# Altium PCB pcb.PcbDoc
Units mm, origin at the board's own origin, x right, y up, seen from the top; angles counter-clockwise.
Board outline 100 x 67 mm, 2 copper layers (Top Layer, Bottom Layer), stack 1.571 mm thick; 72 components, 66 nets, 297 pads, 14 vias.
Unrouted connection lines stored in the file: 43.
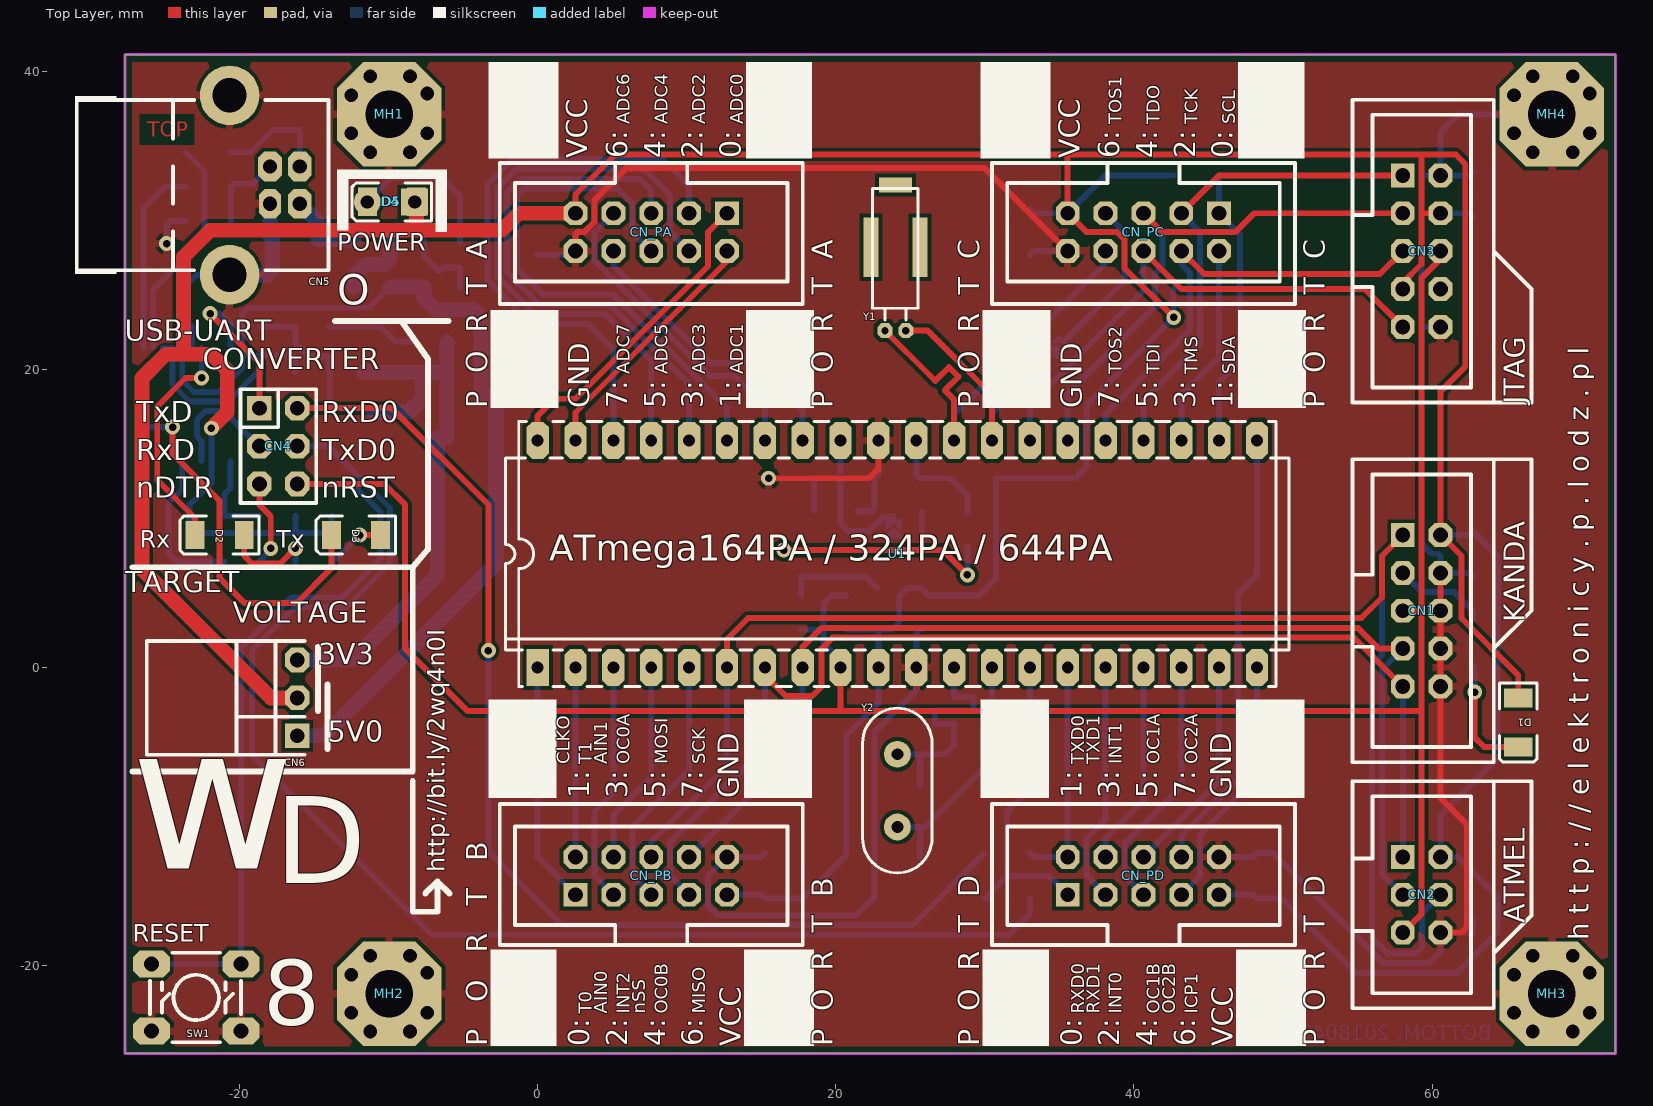
[diagram p0: Top Layer view]
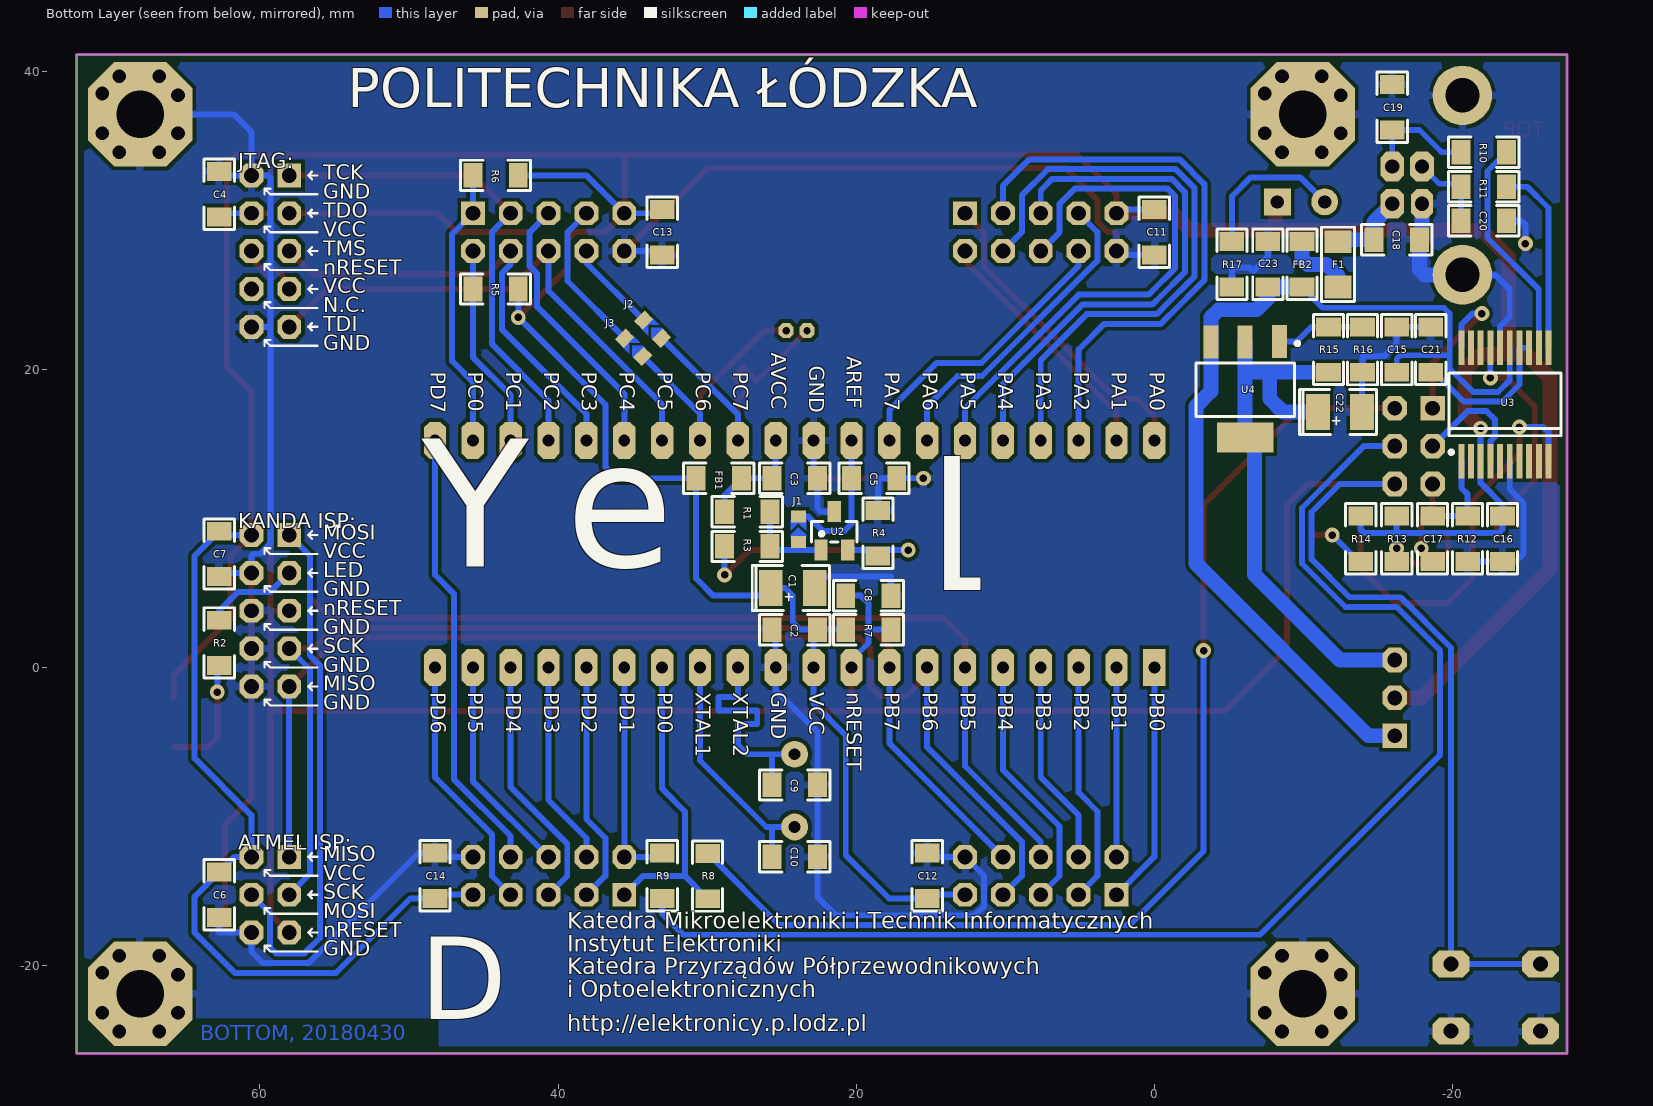
[diagram p1: Bottom Layer view, seen from below]
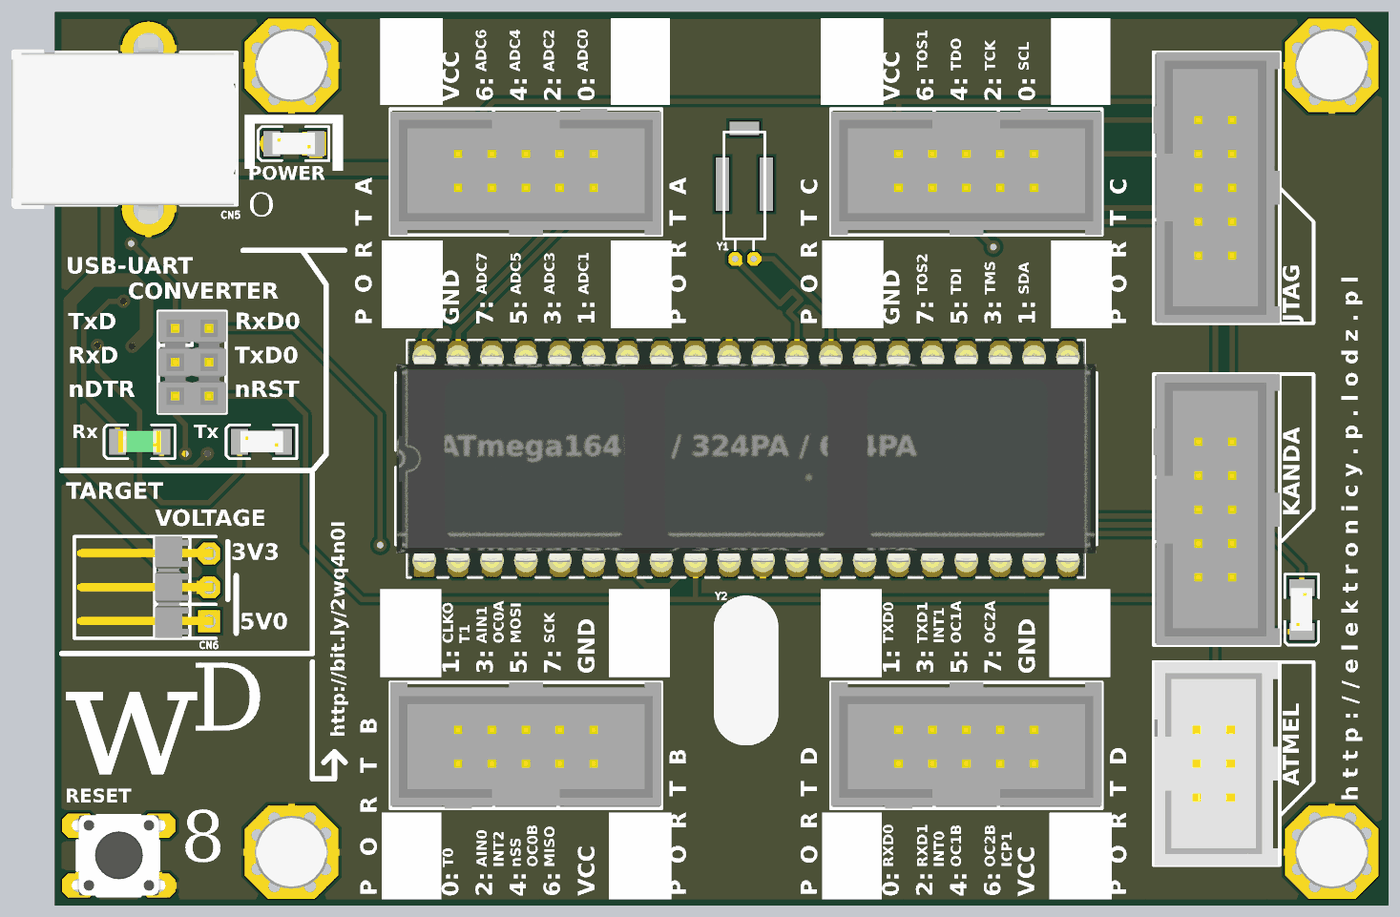
[diagram p2: 3D render of the assembled board from above, using the file's embedded part models]
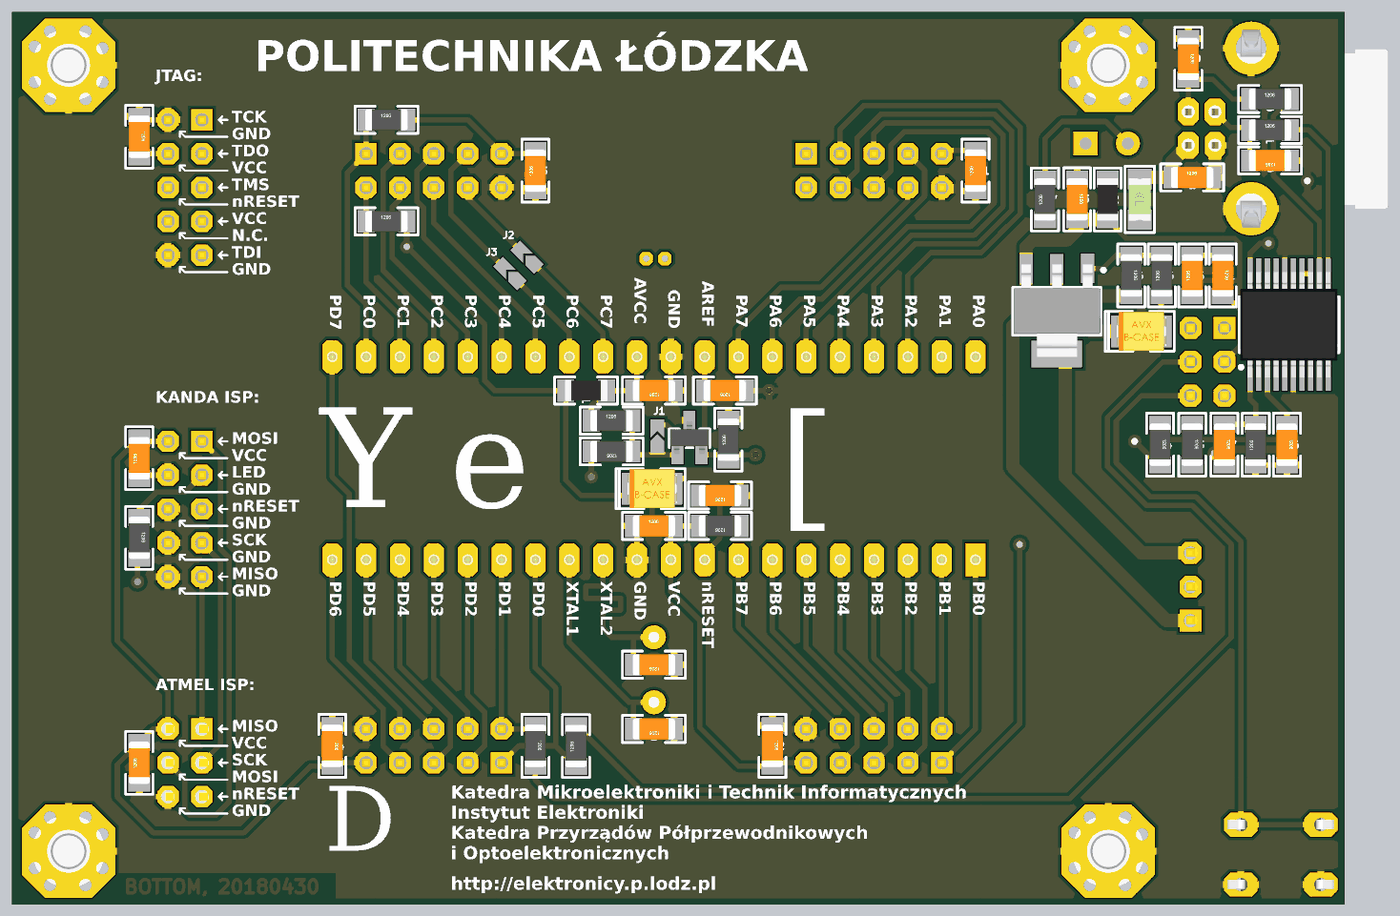
[diagram p3: 3D render of the assembled board from below, using the file's embedded part models]

## Layer stack, top to bottom
Top Solder: solder mask 0.0102, Solder Resist, Dk 3.5
Top Layer: signal copper 0.0356
Dielectric 1: dielectric 1.5, FR-4, Dk 4.8
Bottom Layer: signal copper 0.0356
Bottom Solder: solder mask 0.0102, Solder Resist, Dk 3.5

## Board outline
-27.7,-25.88 -27.7,41.12 72.3,41.12 72.3,-25.88

## Design rules (kind name [scope] priority, off if disabled: settings)
Clearance [All] p1: gap=0.254 ignorepadtopadclearanceinfootprint=FALSE except(0: Arc-Hole Track-Hole SMDPad-Hole THPad-Hole Via-Hole Fill-Hole Poly-Hole Region-Hole Text-Hole)
PolygonConnect [All] p1: connectstyle=Relief reliefconductorwidth=0.5 reliefentries=4 polygonreliefangle="90 Angle" airgapwidth=0.254
RoomDefinition "USB & POWER SHEET" [InComponentClass('USB & POWER SHEET')] p1: confinementstyle=ConfineIn formatcopy=TRUE lockcomponents=FALSE outline -76.2,-71.12 -25.4,-71.12 -25.4,-45.72 -76.2,-45.72
RoomDefinition mcu_with_peripherals [InComponentClass('mcu_with_peripherals')] p2: confinementstyle=ConfineIn formatcopy=TRUE lockcomponents=FALSE outline -46.863,-26.035 151.892,-26.035 151.892,41.275 -46.863,41.275
RoutingVias [All] p1: holewidth=0.5 width=1 viastyle="Through Hole" minholewidth=0.5 minwidth=1 maxholewidth=0.5 maxwidth=1
SolderMaskExpansion [All] p1: expansion=0.102
Width [All] p1: maxlimit=1 minlimit=0.254 preferedwidth=0.4 minimp=50.000000 maximp=50.000000 favimp=50.000000
30 further rules are at their usual default settings.

## Classes and differential pairs
component class "USB & POWER SHEET": C15 C16 C17 C18 C19 C20 C21 C22 C23 CN4 CN5 CN6 D2 D3 D4 D5 D? F1 FB2 R8 R9 R10 R11 R12 R13 R14 R15 R16 R17 R100 R101 R? U3 U4
component class mcu_with_peripherals: C1 C2 C3 C4 C5 C6 C7 C8 C9 C10 C11 C12 C13 C14 CN1 CN2 CN3 CN_PA CN_PB CN_PC CN_PD D1 FB1 J1 J2 J3 MH1 MH2 MH3 MH4 R1 R2 R3 R4 R5 R6 R7 SW1 U1 U2 Y1 Y2

## Components (designator, comment, footprint, x,y, rotation, side; value= is the part's Value field where it differs from the comment)
C1 "4,7uF/10V" SMDB 24.257,5.334 r0 bottom
C2 "100nF" C1206 24.13,2.54 r180 bottom
C3 "100nF" C1206 24.126,12.7 r0 bottom
C4 "100nF" C1206 62.738,31.75 r270 bottom locked
C5 "100nF" C1206 18.805,12.7 r0 bottom
C6 "100nF" C1206 62.738,-15.24 r90 bottom locked
C7 "100nF" C1206 62.738,7.62 r90 bottom locked
C8 "100nF" C1206 19.177,4.826 r0 bottom
C9 "22pF" C1206 24.13,-7.874 r0 bottom
C10 "22pF" C1206 24.13,-12.7 r0 bottom
C11 "100nF" C1206 0,29.21 r90 bottom
C12 "100nF" C1206 15.24,-13.97 r270 bottom
C13 "100nF" C1206 33.02,29.21 r90 bottom
C14 "100nF" C1206 48.26,-13.97 r270 bottom
C15 "100nF" C1206 -16.256,21.336 r90 bottom
C16 "100nF" C1206 -23.361,8.636 r270 bottom
C17 "100nF" C1206 -18.669,8.636 r270 bottom
C18 "10nF" C1206 -16.256,28.702 r180 bottom
C19 "47pF" C1206 -15.96,37.592 r270 bottom
C20 "47pF" C1206 -22.098,29.972 r0 bottom
C21 "100nF" C1206 -18.542,21.336 r270 bottom
C22 "10uF/10V" SMDB -12.446,17.145 r0 bottom
C23 "100nF" C1206 -7.62,27.051 r270 bottom
CN1 "AVR ISP Kanda Interface" IDC10 59.309,3.81 r270 top locked
CN2 "AVR ISP Interface" IDC6 59.309,-15.24 r270 top locked
CN3 "AVR JTAG Interface" IDC10 59.309,27.94 r270 top locked
CN4 "" GP_3x2 -18.669,17.399 r270 top
CN5 "USB B SOCKET" USBB-G -16.96,32.37 r0 top
CN6 "CN_3x1" GP_3x1H -16.129,-4.572 r90 top
CN_PA "IDC Connector" IDC10 7.62,29.21 r180 top
CN_PB "IDC Connector" IDC10 7.62,-13.97 r0 top
CN_PC "IDC Connector" IDC10 40.64,29.21 r180 top
CN_PD "IDC Connector" IDC10 40.64,-13.97 r0 top
D1 "*" LED1206R 65.786,-3.683 r270 top
D2 "" LED1206G -21.336,8.89 r180 top
D3 "" LED1206R -12.192,8.89 r180 top
D4 "LED" "LED-Polarized - 3mm" -8.255,31.242 r180 top
D5 "" LED1206R -9.779,31.242 r180 top
F1 "500mA, 6V" F1206 -12.319,27.051 r270 bottom
FB1 "BLM31PG601SN1L" FB1206 29.214,12.7 r180 bottom
FB2 "BLM31PG601SN1L" FB1206 -9.906,27.051 r90 bottom
J1 "*" JMP2_0603_NO 23.876,9.271 r90 bottom
J2 "*" JMP2_0603_NO 33.655,22.701 r45 bottom
J3 "*" JMP2_0603_NO 34.925,21.485 r45 bottom
MH1 "MHOLE 3mm" "3mm screw drill III" -9.96,37.12 r0 top locked
MH2 "MHOLE 3mm" "3mm screw drill III" -9.96,-21.88 r0 top locked
MH3 "MHOLE 3mm" "3mm screw drill III" 68.04,-21.88 r0 top locked
MH4 "MHOLE 3mm" "3mm screw drill III" 68.04,37.12 r0 top locked
R1 "4k7" R1206 27.305,10.446 r180 bottom
R2 "510R" R1206 62.738,1.651 r270 bottom value=4k7
R3 "4k7" R1206 27.305,8.128 r0 bottom
R4 "4k7" R1206 18.542,9.017 r90 bottom
R5 "4k7" R1206 44.196,25.4 r180 bottom
R6 "4k7" R1206 44.196,33.02 r180 bottom
R7 "10k" R1206 19.177,2.54 r0 bottom
R8 "1k" R1206 29.972,-13.986 r90 bottom
R9 "1k" R1206 33.02,-13.97 r270 bottom
R10 "27R" R1206 -22.098,34.58 r180 bottom
R11 "27R" R1206 -22.098,32.258 r180 bottom
R12 "1k" R1206 -21.017,8.636 r90 bottom
R13 "1k" R1206 -16.256,8.636 r270 bottom
R14 "1k" R1206 -13.843,8.636 r270 bottom
R15 "N.M." R1206 -11.684,21.336 r270 bottom
R16 "0R" R1206 -13.97,21.336 r90 bottom
R17 "1k" R1206 -5.207,27.051 r90 bottom
SW1 "TACT-64K-F" TACT-64K-F -22.908,-22.134 r180 top
U1 "ATmega324PA-PU" DIP40_PRECISION_W_IC 24.13,7.62 r90 top
U2 "TL431" SOT-23 21.463,9.176 r180 bottom
U3 "FT231XS" SSOP20 -20.596,13.843 r180 bottom
U4 "APE1117K-HF-3" SOT-223 -8.396,21.844 r0 bottom
Y1 "32,7456kHz" TC38_3x8_H 24.003,22.606 r0 top
Y2 "*" HC49-S 24.13,-8.255 r270 top

## Footprints (in the part's own frame and the unit in brackets; to place one, negate y for a bottom-side part, rotate by r counter-clockwise, add the part's x,y. Pads: shape width x height; smd on the part's side, far side on the other; paste and mask are expansions set on the pad)
"3mm screw drill III" [mil]
  oct 275.59x275.59 hole 125.98: 1(0,0)
  round 62 hole 36: 2(-50,-100) 3(55,-100) 4(-100,50) 5(-100,-50) 6(100,-50) 7(100,55) 8(-50,100) 9(55,100)
  body extent -108,-108 108,108, height 79
C1206 [mil]
  rect 50x65 smd: 1(-60,0) 2(60,0)
  silkscreen extent -93,-40 93,40, body extent -63,-31 63,31, height 39
DIP40_PRECISION_W_IC [mm]
  rect 2.5x1.5 hole 0.8: 1(-7.62,24.13)
  oct 2.5x1.5 hole 0.8: 2(-7.62,21.59) 3(-7.62,19.05) 4(-7.62,16.51) 5(-7.62,13.97) 6(-7.62,11.43) 7(-7.62,8.89) 8(-7.62,6.35) 9(-7.62,3.81) 10(-7.62,1.27) 11(-7.62,-1.27) 12(-7.62,-3.81) 13(-7.62,-6.35) 14(-7.62,-8.89) 15(-7.62,-11.43) 16(-7.62,-13.97) 17(-7.62,-16.51) 18(-7.62,-19.05) 19(-7.62,-21.59) 20(-7.62,-24.13) 21(7.62,-24.13) 22(7.62,-21.59) 23(7.62,-19.05) 24(7.62,-16.51) 25(7.62,-13.97) 26(7.62,-11.43) 27(7.62,-8.89) 28(7.62,-6.35) 29(7.62,-3.81) 30(7.62,-1.27) 31(7.62,1.27) 32(7.62,3.81) 33(7.62,6.35) 34(7.62,8.89) 35(7.62,11.43) 36(7.62,13.97) 37(7.62,16.51) 38(7.62,19.05) 39(7.62,21.59) 40(7.62,24.13)
  silkscreen extent -8.89,-26.29 8.89,26.29, body extent -8.85,-26.23 8.85,26.22, height 10
F1206 [mil] "1206 Fuse: PTC polymer"
  rect 60x70.87 smd: 1(-60,0) 2(60,0)
  silkscreen extent -98,-43 98,43, body extent -63,-33 63,33, height 22
FB1206 [mil]
  rect 50x65 smd: 1(-60,0) 2(60,0)
  silkscreen extent -93,-40 93,40, body extent -63,-31 63,31, height 43
GP_3x1H [mil]
  rect 65x65 hole 39.37: 1(0,0)
  oct 65x65 hole 39.37: 2(100,0) 3(200,0)
  silkscreen extent -50,-20 250,398, body extent -49,-13 251,390, height 121
GP_3x2 [mil]
  rect 65x65 hole 39.37: 1(0,0)
  oct 65x65 hole 39.37: 2(0,100) 3(100,0) 4(100,100) 5(200,0) 6(200,100)
  silkscreen extent -50,-50 250,150, body extent -50,-50 250,150, height 330
HC49-S [mm] "Crystal Oscillator"
  round 1.8 hole 0.8: 1(-2.44,0) 2(2.44,0)
  silkscreen extent -5.53,-2.32 5.53,2.32, body extent -5.62,-2.35 5.55,2.33, height 3.63
IDC6 [mm] "2.54mm, 6 Pin IDC Male Connector"
  rect 1.6x1.6 hole 1: 1(-2.54,-1.27)
  oct 1.6x1.6 hole 1: 2(-2.54,1.27) 3(0,-1.27) 4(0,1.27) 5(2.54,-1.27) 6(2.54,1.27)
  silkscreen extent -7.62,-4.64 7.61,4.83, body extent -7.62,-4.57 7.62,4.7, height 9.29
IDC10 [mm] "2.54mm, 10 Pin IDC Male Connector"
  rect 1.6x1.6 hole 1: 1(-5.08,-1.27)
  oct 1.6x1.6 hole 1: 2(-5.08,1.27) 3(-2.54,-1.27) 4(-2.54,1.27) 5(0,-1.27) 6(0,1.27) 7(2.54,-1.27) 8(2.54,1.27) 9(5.08,-1.27) 10(5.08,1.27)
  silkscreen extent -10.16,-4.64 10.16,4.83, body extent -10.16,-4.65 10.16,4.83, height 9.27
JMP2_0603_NO [mil]
  rect 32x40 smd: 1(-33.75,0) 2(33.75,0)
  Top Layer region: 26.25,0 16.25,0 -3.75,-20 26.25,-20
  Top Layer region: 26.25,0 16.25,0 -3.75,20 26.25,20
  Top Layer region: -23.75,-20 -13.75,-20 6.25,0 -13.75,20 -23.75,20
LED1206G [mm]
  rect 1.27x1.9 smd: 1(-1.65,0) 2(1.65,0)
  silkscreen extent -2.64,-1.27 2.67,1.27, body extent -1.6,-0.81 1.6,0.79, height 1.11
LED1206R [mm]
  rect 1.27x1.9 smd: 1(-1.65,0) 2(1.65,0)
  silkscreen extent -2.64,-1.27 2.67,1.27, body extent -1.6,-0.81 1.6,0.79, height 1.11
"LED-Polarized - 3mm" [mm]
  rect 1.8x1.8 hole 0.889: 1(0,0)
  round 1.8 hole 0.889: 2(3.175,0)
R1206 [mil]
  rect 50x65 smd: 1(-60,0) 2(60,0)
  silkscreen extent -93,-40 93,40, body extent -63,-31 63,31, height 39
SMDB [mm] "SMDB"
  rect 1.6x2.4 smd: 1(1.476,0) 2(-1.475,0)
  silkscreen extent -2.46,-1.5 2.72,1.5, body extent -1.85,-1.46 1.85,1.47, height 2.03
SOT-23 [mm]
  rect 0.9x1.4 smd: 1(-0.9,-1.3) 2(0.9,-1.3) 3(0,1.3)
  silkscreen extent -1.52,-0.76 1.52,0.64, body extent -1.46,-1.25 1.46,1.23, height 1
SOT-223 [mm]
  rect 1x2.2 smd: 1(0,-0.027) 2(2.3,0) 3(4.6,0)
  rect 3.8x2 smd: 4(2.3,6.4)
  silkscreen extent -1.32,-0.02 5.6,5, body extent -0.96,-0.32 5.54,6.61, height 1.64
SSOP20 [mm]
  rect 0.4x2.3 smd: 1(0,0) 2(0.65,0) 3(1.3,0) 4(1.95,0) 5(2.6,0) 6(3.25,0) 7(3.9,0) 8(4.55,0) 9(5.2,0) 10(5.85,0) 11(5.85,7.62) 12(5.2,7.62) 13(4.55,7.62) 14(3.9,7.62) 15(3.25,7.62) 16(2.6,7.62) 17(1.95,7.62) 18(1.3,7.62) 19(0.65,7.62) 20(0,7.62)
  silkscreen extent -0.82,0.49 6.68,5.91, body extent -0.75,-0.15 6.55,7.75, height 1.79
TACT-64K-F [mm]
  oct 2.5x1.8 hole 1: 1(-3,2.25) 1(3,2.25) 2(-3,-2.25) 2(3,-2.25)
  silkscreen extent -3,-3 3.1,3, body extent -4.01,-3.02 3.97,2.98, height 4.9
TC38_3x8_H [mm] "THT TC38 (Size: 3x8mm) Horizontal Mounted Crystal Oscillator"
  rect 1x4 smd: 0(-1.651,5.588) 0(1.651,5.588)
  rect 2.2x1 smd: 0(0,9.779)
  oct 1x1 hole 0.5: 1(-0.7,0) 2(0.7,0)
  silkscreen extent -1.52,0.7 1.52,9.53
USBB-G [mm] "USB-B PCB Angle Socket"
  oct 1.6x2 hole 0.95: 1(1,-1.25) 2(1,1.25) 3(-1,1.25)
  oct 1.5x2 hole 0.95: 4(-1,-1.25)
  round 4 hole 2.3: 5(-3.71,6.02) 6(-3.71,-6.02)
  silkscreen extent -14.07,-5.97 2.92,5.97, body extent -14,-7.47 3,7.42, height 11

## Part data
C1 C22: library part "Cap Pol Tant", "Polarized Tantalum Capacitor", ComponentLink1Description=datasheet, ComponentLink2Description=supplier
C2 C3 C4 C5 C6 C7 C8 C9 C10 C11 C12 C13 C14 C15 C16 C17 C18 C19 C20 C21 C23: library part Cap, "Capacitor", ComponentLink1Description=datasheet, ComponentLink2Description=supplier
CN1: "Kanda ISP Programming Header for AVR MCU's"
CN2: "ISP Programming Header for AVR MCU's"
CN3: "JTAG Header for AVR MCU's"
CN4: library part CN_3x2
CN5: "USB connector", Published=20-Mar-2006
CN_PA CN_PB CN_PC CN_PD: library part CN_5x2
D1 D3 D5: library part LED_RED, "RED LED", Published=04-Apr-2006
D2: library part LED_GREEN, "GREEN LED", Published=04-Apr-2006
D4: "Typical RED, GREEN, YELLOW, AMBER GaAs LED", Published=04-Apr-2006
F1: library part 1206L050, "500mA, 6V PTC Fuse", Supplier Part Number 1=SM010-60, LatestRevisionDate=17-Jul-2002, LatestRevisionNote="Re-released for DXP Platform.", PackageDescription="Thru-Hole; 2 Leads", PackageReference=PIN-W2/E2.8, Published=8-Jun-2000, Publisher="Altium Limited", Supplier 1=TME
FB1 FB2: "Ferrite Bead; Imp.@ 100MHz:600R; Mounting: SMD; 1,5A; Case: 1206"
J1 J2 J3: library part JUMPER2_NO, "Solder Jumper - Open"
MH1 MH2 MH3 MH4: library part MHOLE_3MM, "3mm Mounting Hole"
R1 R2 R3 R4 R5 R6 R7 R8 R9 R10 R11 R12 R13 R14 R15 R16 R17: library part Res, "Resistor", ComponentLink1Description=datasheet, ComponentLink2Description=supplier, Published=19-Feb-2006
SW1: "6x6mm THT Tactile SPST-NO Switch", Published=30-Jun-2006
U1: "8-bit AVR Microcontroller, 32KB Flash, 1KB EEPROM, 2KB SRAM, 40-pin PDIP, Industrial Grade (-40°C to 85°C)", Code_JEDEC=MS-011-AC, ComponentLink1Description="Manufacturer URL", ComponentLink1URL=http://www.atmel.com/, ComponentLink2Description="ATmega164A/164PA/324A/324PA/644A/644PA/1284/1284P Datasheet", ComponentLink2URL=http://www.atmel.com/dyn/resources/prod_documents/doc8272.pdf, ComponentLink3Description="ATmega164A/164PA/324A/324PA/644A/644PA/1284/1284P Summary", ComponentLink3URL=http://www.atmel.com/dyn/resources/prod_documents/8272S.pdf, DatasheetVersion="revC, Jun-2011", PackageDescription="40-lead (0.600\"/15.24mm Wide) Plastic Dual Inline Package (PDIP)", PackageReference=40P6, PackageVersion="revB, Sep-2001"
U2: library part TL431BCDBZ, "0,5% Precision Programmable Reference"
U3: "FT231X USB to UART IC", Supplier Part Number 1=FT231XS-U, ComponentLink1Description="Manufacturer Link", ComponentLink1URL=http://www.ftdichip.com/Products/ICs/FT232R.htm, ComponentLink2Description=Datasheet, ComponentLink2URL=http://www.ftdichip.com/Support/Documents/DataSheets/ICs/DS_FT232R.pdf, PackageReference=SSOP28, Published=07-Mar-2006, Supplier 1=TME, Supplier 2=TME, Supplier 3=Farnell, Supplier 4=Farnell, Supplier Part Number 2=FT231XS-R, Supplier Part Number 3=2081328RL, Supplier Part Number 4=2081328
U4: "800mA Low-Dropout Adjustable, 1A Linear Regulator, SOT223 Package", ComponentLink1Description="Manufacturer Link", ComponentLink1URL=http://www.st.com/, ComponentLink2Description=Datasheet, ComponentLink2URL=http://www.st.com/stonline/books/pdf/docs/2574.pdf, DatasheetVersion=Feb-2004, LatestRevisionDate=06-Jun-2005, LatestRevisionNote="PCB Pin sequence re-ordered.", PackageDescription="TO, Thru-Hole, Vertical, Heatsink Mounted; 3 In-Line Leads; Pitch 2.54 mm", PackageReference=TO-220A, PackageVersion=Jul-2004, Published=24-Aug-2001, Publisher="Altium Limited", Supplier 1=TME, Supplier Part Number 1=APE1117K-HF-3
Y1: library part "Clock XTAL", "Crystal Clock Oscillator", ComponentLink1Description=datasheet, ComponentLink2Description=supplier
Y2: library part XTAL_2PIN, "Crystal Oscillator", ComponentLink1Description=datasheet, ComponentLink2Description=supplier

## Via types
v1: diameter 1, hole 0.5, Top Layer to Bottom Layer, tented both sides, 14 vias

## Nets (pads, with @x,y where several pads share a name; then routed paths per layer and width w, separated by ;. In a path a pad name is that pad's centre, name@x,y a point inside that pad or via, vN(x,y) a via of type N, cw(c..) or ccw(c..) an arc to the next point about the centre after c; other vN are vias at no path point)
AREF: C5.2 J1.2 U1.32 | length 10
  Bottom Layer w0.4: U1.32 20.32,12.95 20.57,12.7 20.32,12.45 20.32,9.639 20.783,9.176 22.257,9.176 23.209,10.128 J1.2
AVCC: C3.2 FB1.2 R1.1 U1.30 | length 7.4
  Bottom Layer w0.4: U1.30 25.4,12.95 C3.2 FB1.2 28.829,11.561 R1.1
GND: C1.2 C2.1 C3.1 C4.1 C5.1 C6.1 C7.1 C8.1 C9.1 C10.1 C11.1 C12.1 C13.1 C14.1 C15.2 C16.2 C18.2 C19.1 C20.1 C21.1 C22.2 C23.1 CN1.4 CN1.6 CN1.8 CN1.10 CN2.6 CN3.2 CN3.10 CN5.4 CN5.5 CN5.6 CN_PA.10 CN_PB.10 CN_PC.10 CN_PD.10 MH1.1 MH2.1 MH3.1 MH4.1 R4.2 R12.1 R16.1 R17.1 SW1.1 U1.11 U1.31 U2.3 U3.6 U3.16 | length 247.3
  Top Layer w0.4: CN_PA.10 2.54,29.083 2.683,29.226 3.128,29.226 3.826,29.924 3.826,31.385 5.969,33.528 29.972,33.528 CN_PC.10 ; v1(15.494,12.7) 22.225,12.7 22.86,13.335 U1.31 ; CN2.6 61.976,-17.78 62.357,-17.399 62.357,-10.541 60.579,-8.763 CN1.10 CN1.8 CN1.6 CN1.4
  Bottom Layer w0.4: v1(-24.892,28.439) -24.892,29.718 -24.638,29.972 C20.1 ; U3.6 -23.846,11.968 -24.774,11.04 -24.774,7.629 -24.257,7.112 C16.2 R12.1 ; U3.16 -23.196,22.885 -23.846,23.535 -23.846,25.371 -22.867,26.35 CN5.6 ; C21.1 C15.2 -16.256,21.721 -15.436,20.901 -14.995,20.901 -14.977,20.882 -14.02,20.882 -13.97,20.832 R16.1 -13.921,19.763 C22.2 ; C23.1 -7.62,27.569 -6.667,26.616 -6.606,26.616 -6.396,26.827 -5.207,26.827 R17.1 ; C11.1 2.286,27.686 CN_PA.10 ; C12.1 14.986,-12.7 CN_PB.10 11.43,-13.97 11.43,-16.002 12.046,-16.618 21.355,-16.618 22.606,-15.367 C10.1 C9.1 22.606,-4.318 25.4,-1.524 U1.11 25.4,2.286 C2.1 ; v1(15.494,12.7) C5.1 18.316,12.7 18.542,12.474 R4.2 ; C8.1 17.653,6.105 22.01,6.105 C1.2 ; U2.3 22.383,10.476 22.602,10.695 C3.1 22.86,12.958 U1.31 ; C13.1 33.274,27.94 CN_PC.10 ; CN_PD.10 48.006,-12.7 C14.1 49.367,-12.446 56.752,-19.831 59.798,-19.831 60.579,-19.05 CN2.6 62.738,-17.78 C6.1 ; CN3.10 59.309,22.86 ; C7.1 62.484,6.35 CN1.4 60.579,7.493 60.436,7.636 59.991,7.636 59.309,8.318 59.309,22.86 ; C4.1 62.484,33.02 CN3.2 ; MH4.1 61.758,37.12 60.579,35.941 CN3.2 ; 59.309,22.86 59.309,32.893 59.436,33.02 CN3.2
  Bottom Layer w1: CN5.6 -18.136,26.35 -17.78,26.706 C18.2 -17.96,28.882 CN5.4
NetC9_2: C9.2 U1.12 Y2.1 | length 16.5
  Bottom Layer w0.4: Y2.1 25.654,-5.815 ; C9.2 25.654,-5.815 ; U1.12 27.94,-1.524 27.94,-1.978 29.24,-1.978 29.24,-2.886 27.94,-2.886 26.64,-2.886 26.64,-3.794 27.94,-3.794 27.94,-4.191 27.94,-5.18 27.305,-5.815 25.654,-5.815
NetC10_2: C10.2 U1.13 Y2.2 | length 16.4
  Bottom Layer w0.4: Y2.2 25.654,-10.695 ; C10.2 25.654,-10.695 ; U1.13 30.48,-6.232 26.017,-10.695 25.654,-10.695
NetC17_1: C17.1 R12.2 U3.1 | length 6.2
  Bottom Layer w0.4: U3.1 -20.596,12.043 -21.017,11.622 R12.2 C17.1
NetC17_2: C17.2 CN4.5 | length 5.8
  Top Layer w0.4: CN4.5 -18.669,10.922 -17.907,10.16 v1(-17.907,8.001)
  Bottom Layer w0.4: C17.2 -17.907,7.874 v1(-17.907,8.001)
NetC18_1: C18.1 CN5.1 F1.1 | length 5.4
  Bottom Layer w1: CN5.1 -14.732,29.892 C18.1 -12.446,28.702 F1.1
NetC19_2: C19.2 CN5.2 R10.1 | length 7.7
  Bottom Layer w0.381: R10.1 -19.268,34.58 -17.78,36.068 C19.2 CN5.2
NetC20_2: C20.2 CN5.3 R11.1 | length 5.5
  Bottom Layer w0.381: C20.2 R11.1 -20.383,32.448 -19.131,32.448 CN5.3
NetC21_2: C21.2 U3.13 U3.14 | length 10.4
  Bottom Layer w0.381: U3.13 U3.14 -24.496,18.986 -23.361,17.851 -20.757,17.851 -18.796,19.812 C21.2
NetCN1_3: CN1.3 R2.1 | length 6.4
  Bottom Layer w0.4: CN1.3 59.309,5.08 61.468,5.08 62.738,3.81 R2.1
NetCN4_1: CN4.1 U3.20 | length 10.9
  Top Layer w0.4: v1(-21.971,23.749) -18.669,20.447 CN4.1
  Bottom Layer w0.4: v1(-21.971,23.749) -21.336,23.749 -20.596,23.009 U3.20
NetCN4_2: CN4.2 R8.2 | length 76.1
  Top Layer w0.4: CN4.2 -9.779,17.399 -3.302,10.922 v1(-3.302,1.143)
  Bottom Layer w0.4: v1(-3.302,1.143) -3.302,-12.319 1.651,-17.272 25.162,-17.272 R8.2
NetCN4_3: CN4.3 U3.4 | length 8.3
  Bottom Layer w0.4: U3.4 -22.546,15.185 -22.867,15.506 -22.867,16.63 -22.29,17.207 -21.017,17.207 CN4.3
NetCN4_4: CN4.4 R9.2 | length 89.1
  Bottom Layer w0.4: CN4.4 -14.061,14.859 -9.906,10.704 -9.906,6.985 -12.827,4.064 -16.26,4.064 -19.177,1.147 -19.177,-5.842 -7.093,-17.926 31.604,-17.926 33.02,-16.51 R9.2
NetD1_2: D1.2 R2.2 | length 8.1
  Top Layer w0.4: v1(62.865,-1.651) 62.865,-4.699 63.499,-5.333 D1.2
  Bottom Layer w0.4: R2.2 62.865,0 v1(62.865,-1.651)
NetD2_1: D2.1 R13.2 | length 6.3
  Top Layer w0.4: D2.1 -19.686,7.494 -19.177,6.985 -17.272,6.985 v1(-16.256,8.001)
  Bottom Layer w0.4: R13.2 v1(-16.256,8.001)
NetD2_2: D2.2 U3.17 | length 15.5
  Top Layer w0.381: D2.2 -22.986,10.032 -25.527,12.573 -25.527,17.526 -23.622,19.431 v1(-22.546,19.431)
  Bottom Layer w0.381: v1(-22.546,19.431) U3.17
NetD3_1: D3.1 R14.2 | length 4
  Top Layer w0.4: v1(-11.938,8.89) D3.1
  Bottom Layer w0.4: R14.2 -13.716,7.112 v1(-11.938,8.89)
NetD3_2: D3.2 U3.10 | length 27.2
  Top Layer w0.4: v1(-24.496,16.129) -24.496,14.336 -21.336,11.176 -21.336,6 -19.654,4.318 -16.177,4.318 -13.842,6.653 D3.2 D3.2@-13.842,9.143
  Bottom Layer w0.4: U3.10 -26.446,15.77 ; -26.446,15.905 -26.446,15.77 ; v1(-24.496,16.129) -26.087,16.129 -26.446,15.77
NetD4_2: D4.2 D5.2 R17.2 | length 10.5
  Bottom Layer w0.4: D4.2 -9.779,32.893 -6.477,32.893 -5.207,31.623 R17.2
NetF1_2: F1.2 FB2.2 | length 4.8
  Bottom Layer w1: F1.2 -12.319,26.289 -11.557,27.051 -10.287,27.051 -9.906,27.432 FB2.2
NetJ1_1: J1.1 R1.2 R3.1 U2.1 | length 5.8
  Bottom Layer w0.4: U2.1 25.529,7.876 R3.1 R1.2
NetJ2_1: J2.1 U1.29 Y1.1 | length 20.9
  Top Layer w0.4: Y1.1 26.351,19.558 26.672,19.237 27.591,20.156 28.233,19.514 27.314,18.595 27.907,18.002 27.94,17.969 U1.29
  Bottom Layer w0.4: U1.29 27.94,16.986 J2.1
NetJ3_1: J3.1 U1.28 Y1.2 | length 17.8
  Top Layer w0.4: Y1.2 26.162,22.606 30.48,18.288 U1.28
  Bottom Layer w0.4: U1.28 30.48,17.04 J3.1
NetR3_2: R3.2 R4.1 U2.2 | length 19
  Top Layer w0.4: v1(16.51,7.874) 27.174,7.874 27.176,7.876 v1(28.829,6.223)
  Bottom Layer w0.4: v1(16.51,7.874) 20.558,7.874 20.559,7.876 20.561,7.874 U2.2 ; v1(28.829,6.223) R3.2
NetR10_2: R10.2 U3.12 | length 15.1
  Bottom Layer w0.381: U3.12 -25.796,25.385 -22.352,28.829 -22.352,33.31 R10.2
NetR11_2: R11.2 U3.11 | length 12.8
  Bottom Layer w0.381: U3.11 -26.446,30.831 -25.019,32.258 R11.2
NetR15_1: R15.1 R16.2 U4.1 | length 6
  Bottom Layer w0.4: R16.2 R15.1 -10.541,22.86 -9.552,21.871 U4.1
nRESET: C8.2 CN1.5 CN2.5 CN3.6 CN4.6 R7.1 SW1.2 U1.9 | length 195
  Top Layer w0.4: CN4.6 -10.287,12.319 -8.89,10.922 -8.89,1.27 -4.699,-2.921 20.32,-2.921 ; U1.9 20.32,-2.921 ; CN2.5 59.309,-16.51 59.309,-2.794 ; CN1.5 59.309,3.81 ; CN3.6 60.579,27.432 59.309,26.162 59.309,3.81 ; 20.32,-2.921 59.182,-2.921 59.309,-2.794 ; 59.309,-2.794 59.309,3.81
  Bottom Layer w0.4: SW1.2@-25.908,-19.884 -19.908,-19.884 -19.908,1.341 -16.531,4.718 -13.098,4.718 -10.56,7.256 -10.56,10.433 -12.446,12.319 CN4.6 ; R7.1 19.177,2.54 ; U1.9 20.32,0.508 19.177,1.651 19.177,2.54 ; C8.2 19.685,4.826 19.177,4.318 19.177,2.54
PA0_ADC0: CN_PA.1 U1.40 | length 21.3
  Top Layer w0.4: U1.40 0,16.891 1.143,18.034 2.54,18.034 11.43,26.924 11.43,29.21 CN_PA.1
PA1_ADC1: CN_PA.2 U1.39 | length 16.9
  Top Layer w0.4: U1.39 2.54,17.109 12.7,27.269 CN_PA.2
PA2_ADC2: CN_PA.3 U1.38 | length 39.7
  Bottom Layer w0.4: -1.793,24.418 -0.432,23.057 3.359,23.057 5.08,21.336 U1.38 ; -1.793,24.419 -2.442,25.068 -3.359,25.984 -3.359,32.436 -1.702,34.093 8.38,34.093 10.16,32.313 CN_PA.3
PA3_ADC3: CN_PA.4 U1.37 | length 41.1
  Bottom Layer w0.4: -1.139,24.689 -0.161,23.711 4.538,23.711 7.62,20.629 U1.37 ; -1.139,24.69 -2.171,25.722 -2.705,26.255 -2.705,32.165 -1.431,33.439 7.129,33.439 8.89,31.678 8.89,29.21 CN_PA.4
PA4_ADC4: CN_PA.5 U1.36 | length 36.4
  Bottom Layer w0.4: -1.901,26.376 -2.051,26.526 -2.051,31.894 -1.16,32.785 6.839,32.785 7.62,32.004 CN_PA.5 ; -1.9,26.376 -0.485,24.961 0.11,24.365 4.809,24.365 10.16,19.014 U1.36
PA5_ADC5: CN_PA.6 U1.35 | length 37.1
  Bottom Layer w0.4: CN_PA.6 6.35,29.21 6.35,31.115 5.334,32.131 -0.889,32.131 -1.397,31.623 -1.397,26.798 0.169,25.232 0.381,25.019 5.08,25.019 12.7,17.399 U1.35
PA6_ADC6: CN_PA.7 U1.34 | length 21.5
  Bottom Layer w0.4: CN_PA.7 3.826,29.226 3.826,27.289 11.557,19.558 13.208,19.558 15.24,17.526 U1.34
PA7_ADC7: CN_PA.8 U1.33 | length 19.7
  Bottom Layer w0.4: CN_PA.8 5.08,26.96 11.593,20.447 14.605,20.447 17.78,17.272 U1.33
PB0_T0: CN_PB.1 U1.1 | length 16.3
  Bottom Layer w0.4: U1.1 0,-12.7 CN_PB.1
PB1_CLKO_T1: CN_PB.2 U1.2 | length 12.7
  Bottom Layer w0.4: CN_PB.2 U1.2
PB2_AIN0_INT2: CN_PB.3 U1.3 | length 16.3
  Bottom Layer w0.4: CN_PB.3 3.81,-13.97 3.81,-9.652 5.08,-8.382 U1.3
PB3_AIN1_OC0A: CN_PB.4 U1.4 | length 13.8
  Bottom Layer w0.4: CN_PB.4 5.08,-9.906 7.62,-7.366 U1.4
PB4_nSS_OC0B: CN_PB.5 U1.5 | length 17.3
  Bottom Layer w0.4: CN_PB.5 6.366,-13.986 6.366,-10.652 10.16,-6.858 U1.5
PB5_MOSI: CN1.1 CN2.4 CN_PB.6 U1.6 | length 102.4
  Top Layer w0.4: U1.6 12.7,1.905 14.116,3.321 55.264,3.321 56.642,4.699 56.642,7.493 CN1.1
  Bottom Layer w0.4: CN_PB.6 7.62,-11.684 12.7,-6.604 U1.6 ; CN1.1 56.642,7.493 56.642,0.798 55.988,0.144 55.988,-18.142 57.023,-19.177 58.928,-19.177 59.325,-18.78 59.325,-16.494 CN2.4
PB6_MISO: CN1.9 CN2.1 CN_PB.7 U1.7 | length 78.2
  Top Layer w0.4: U1.7 15.24,-0.508 16.637,-1.905 18.415,-1.905 19.05,-1.27 19.05,1.27 19.793,2.013 54.756,2.013 CN1.9
  Bottom Layer w0.4: CN_PB.7 8.89,-13.97 8.89,-11.684 15.24,-5.334 U1.7 ; CN2.1 CN1.9
PB7_SCK: CN1.7 CN2.3 CN_PB.8 U1.8 | length 76.3
  Top Layer w0.4: U1.8 17.78,1.397 19.05,2.667 55.027,2.667 56.424,1.27 CN1.7
  Bottom Layer w0.4: CN_PB.8 17.78,-5.08 U1.8 ; CN2.3 56.642,-13.843 56.642,-0.127 CN1.7
PC0_SCL: CN_PC.1 R6.1 U1.22 | length 18.9
  Bottom Layer w0.4: U1.22 45.72,19.177 47.117,20.574 47.117,29.083 CN_PC.1 R6.1
PC1_SDA: CN_PC.2 R5.1 U1.23 | length 13.8
  Bottom Layer w0.4: U1.23 43.18,18.288 45.72,20.828 R5.1 CN_PC.2
PC2_TCK: CN3.1 CN_PC.3 U1.24 | length 33.3
  Top Layer w0.4: CN_PC.3 45.72,33.02 CN3.1
  Bottom Layer w0.4: U1.24 40.64,17.907 44.45,21.717 44.45,29.21 CN_PC.3
PC3_TMS: CN3.5 CN_PC.4 U1.25 | length 31.4
  Top Layer w0.4: CN_PC.4 44.704,26.416 56.515,26.416 CN3.5
  Bottom Layer w0.4: U1.25 38.1,17.018 43.776,22.694 43.776,26.455 43.18,27.051 CN_PC.4
PC4_TDO: CN3.3 CN_PC.5 U1.26 | length 36.8
  Top Layer w0.4: CN_PC.5 41.91,29.21 46.81,29.21 48.08,30.48 CN3.3
  Bottom Layer w0.4: U1.26 35.56,18.36 41.402,24.202 41.402,26.416 41.91,26.924 41.91,29.21 CN_PC.5
PC5_TDI: CN3.9 CN_PC.6 U1.27 | length 35.4
  Top Layer w0.4: CN_PC.6 43.18,25.4 55.499,25.4 CN3.9
  Bottom Layer w0.4: U1.27 33.02,17.653 40.64,25.273 CN_PC.6
PC6: CN_PC.7 J3.2 | length 10.5
  Bottom Layer w0.4: J3.2 39.37,25.93 39.37,29.21 CN_PC.7
PC7: CN_PC.8 J2.2 | length 6.2
  Bottom Layer w0.4: J2.2 38.1,27.146 CN_PC.8
PD0_RXD0: CN_PD.1 R8.1 U1.14 | length 21.5
  Bottom Layer w0.4: R8.1 30.21,-15.51 30.21,-15.256 31.496,-13.97 ; U1.14 33.02,-8.128 31.496,-9.652 31.496,-13.97 ; CN_PD.1 34.29,-13.97 31.496,-13.97
PD1_TXD0: CN_PD.2 R9.1 U1.15 | length 15.3
  Bottom Layer w0.4: R9.1 33.274,-12.7 CN_PD.2 U1.15
PD2_RXD1_INT0: CN_PD.3 U1.16 | length 16.3
  Bottom Layer w0.4: CN_PD.3 36.83,-13.97 36.83,-11.43 38.1,-10.16 U1.16
PD3_TXD1_INT1: CN_PD.4 U1.17 | length 13.8
  Bottom Layer w0.4: CN_PD.4 38.1,-11.43 40.64,-8.89 U1.17
PD4_OC1B: CN_PD.5 U1.18 | length 17.3
  Bottom Layer w0.4: CN_PD.5 39.386,-13.986 39.386,-11.822 43.18,-8.028 U1.18
PD5_OC1A: CN_PD.6 U1.19 | length 14.8
  Bottom Layer w0.4: CN_PD.6 45.72,-7.62 U1.19
PD6_OC2B_ICP1: CN_PD.7 U1.20 | length 17.3
  Bottom Layer w0.4: CN_PD.7 44.434,-13.986 44.434,-11.192 48.26,-7.366 U1.20
PD7_OC2A: CN_PD.8 U1.21 | length 30
  Bottom Layer w0.4: CN_PD.8 43.18,-11.303 46.99,-7.493 46.99,4.953 48.26,6.223 U1.21
VCC: C1.1 C2.2 C4.2 C6.2 C7.2 C11.2 C12.2 C13.2 C14.2 C16.1 CN1.2 CN2.2 CN3.4 CN3.7 CN6.2 CN_PA.9 CN_PB.9 CN_PC.9 CN_PD.9 D1.1 D4.1 D5.1 FB1.1 R5.2 R6.2 R7.2 R13.1 R14.1 U1.10 U3.3 | length 357.2
  Top Layer w0.4: CN_PA.9 2.54,31.75 5.207,34.417 35.56,34.417 ; v1(42.672,23.495) 39.37,26.797 39.37,28.702 38.862,29.21 36.83,29.21 CN_PC.9 35.56,34.417 ; CN3.7 58.039,25.817 59.293,27.071 59.293,30.48 ; CN3.4 59.293,30.48 ; D1.1 65.786,-0.508 61.976,3.302 61.976,7.493 CN1.2 60.579,18.542 62.23,20.193 62.23,33.782 61.595,34.417 59.182,34.417 ; 35.56,34.417 59.182,34.417 ; 59.182,34.417 59.293,34.306 59.293,30.48
  Top Layer w1: v1(-21.896,16.054) -20.828,17.122 -20.828,19.939 -21.907,21.018 -23.558,21.018 ; CN6.2 -17.907,-2.032 -26.543,6.604 -26.543,19.431 -24.956,21.018 -23.558,21.018 ; D5.1 -8.129,29.337 ; CN_PA.9 -1.27,30.48 -2.413,29.337 -8.129,29.337 ; -23.558,21.018 -23.749,21.209 -23.749,27.559 -21.971,29.337 -8.129,29.337
  Bottom Layer w0.4: v1(-21.896,16.054) U3.3 -21.896,12.394 -23.361,10.929 C16.1 -23.361,9.264 -23.114,9.017 -16.256,9.017 ; R13.1 -16.256,9.017 ; R14.1 -13.843,9.271 -14.097,9.017 -16.256,9.017 ; C11.2 2.286,30.734 CN_PA.9 ; CN_PB.9 14.986,-15.24 C12.2 17.789,-15.494 20.701,-12.582 20.701,-4.561 22.86,-2.402 U1.10 22.86,2.461 C2.2@22.939,2.54 ; R7.2 C2.2 C2.2@22.939,2.54 ; C13.2 33.274,30.48 CN_PC.9 38.1,33.02 R6.2 ; R5.2 v1(42.672,23.495) 36.83,17.653 36.83,13.462 36.068,12.7 FB1.1 30.738,5.973 29.591,4.826 26.241,4.826 C1.1 24.765,5.334 24.257,4.826 24.257,3.048 23.749,2.54 C2.2@22.939,2.54 ; CN_PD.9 48.006,-15.24 C14.2 49.911,-15.494 54.902,-20.485 61.684,-20.485 64.389,-17.78 64.389,-15.367 C6.2 61.722,-12.7 CN2.2 60.579,-9.906 64.389,-6.096 64.389,7.493 C7.2 62.484,8.89 CN1.2 ; CN3.4 62.484,30.48 C4.2
VCC_3V3: C22.1 CN6.3 R15.2 U4.2 U4.4 | length 38.3
  Bottom Layer w1: CN6.3 -12.446,0.508 -6.717,6.237 U4.4@-6.717,15.444 ; R15.2 -7.747,19.812 ; C22.1 -8.636,17.145 -7.747,18.034 -7.747,19.812 ; U4.4 -6.096,19.812 ; U4.2 -6.096,19.812 ; -7.747,19.812 -6.096,19.812
VCC_5V: C15.1 C23.2 CN6.1 FB2.1 U3.15 U4.3 | length 68.5
  Bottom Layer w0.381: U3.15 -23.846,19.274 -23.058,18.486 -21.392,18.486 -19.812,20.066 -19.812,20.955 ; C15.1 -16.256,20.701 -16.51,20.955 -19.812,20.955 ; FB2.1 -11.303,24.13 -19.431,24.13 -19.812,23.749 -19.812,20.955
  Bottom Layer w1: CN6.1 -14.351,-4.572 -2.794,6.985 -2.794,17.526 -3.796,18.528 U4.3 -3.796,23.481 -4.318,24.003 -6.858,24.003 -7.62,24.765 C23.2 FB2.1
pads on no net: CN3.8 MH1.2 MH1.3 MH1.4 MH1.5 MH1.6 MH1.7 MH1.8 MH1.9 MH2.2 MH2.3 MH2.4 MH2.5 MH2.6 MH2.7 MH2.8 MH2.9 MH3.2 MH3.3 MH3.4 MH3.5 MH3.6 MH3.7 MH3.8 MH3.9 MH4.2 MH4.3 MH4.4 MH4.5 MH4.6 MH4.7 MH4.8 MH4.9 U3.2 U3.5 U3.7 U3.8 U3.9 U3.18 U3.19 Y1.0

## Polygon pours and split planes (outlines as drawn)
GND on Top Layer "Top Layer-GND" (solid, remove dead copper, pour order 1): -27.2,-25.4 71.8,-25.4 71.8,40.6 -27.2,40.6
GND on Bottom Layer "Bottom Layer-GND" (solid, remove dead copper, pour order 0): -27.2,-25.4 -27.2,40.6 71.8,40.6 71.8,-25.4

## Keep-outs
Keep-Out Layer:
  lines w0.2: -27.7,-25.88 -27.7,41.12 72.3,41.12 72.3,-25.88 -27.7,-25.88 ; -27.7,-25.88 -27.7,-25.88

## Other copper
Top Layer:
  text "TOP" at -26.2,35.6 h1
Bottom Layer:
  text "BOTTOM, 20180430" at 64.008,-25.019 h1

## Silkscreen, mask and mechanical layers (free items; w line width, h text height)
Top Overlay:
  rectangle: -13.462,32.766 -6.096,33.401
  rectangle: -6.858,29.21 -6.096,33.147
  rectangle: -13.462,29.337 -12.7,33.274
  region: 51.562,24.003 46.99,24.003 46.99,17.399 51.562,17.399
  region: 51.435,40.64 46.99,40.64 46.99,34.163 51.435,34.163
  rectangle: 29.845,17.399 34.417,24.003
  rectangle: 29.718,34.163 34.417,40.64
  region: 18.542,24.003 13.97,24.003 13.97,17.399 18.542,17.399
  region: 18.415,40.64 13.97,40.64 13.97,34.163 18.415,34.163
  rectangle: -3.175,17.399 1.397,24.003
  rectangle: -3.302,34.163 1.397,40.64
  rectangle: 29.718,-8.763 34.29,-2.159
  rectangle: 29.845,-25.4 34.29,-18.923
  region: 51.435,-2.159 46.863,-2.159 46.863,-8.763 51.435,-8.763
  region: 51.562,-18.923 46.863,-18.923 46.863,-25.4 51.562,-25.4
  region: 18.542,-18.923 13.843,-18.923 13.843,-25.4 18.542,-25.4
  region: 18.415,-2.159 13.843,-2.159 13.843,-8.763 18.415,-8.763
  rectangle: -3.175,-25.4 1.27,-18.923
  rectangle: -3.302,-8.763 1.27,-2.159
  lines w0.254: 64.135,-19.177 66.675,-16.637 66.675,-7.62 64.135,-7.62 ; 64.135,1.27 66.675,3.81 66.675,13.97 64.135,13.97 ; 64.135,17.78 66.675,17.78 66.675,25.4 64.135,27.94
  lines w0.4: -27.178,-6.985 -8.382,-6.985 -8.382,6.731 ; -27.178,6.731 -8.382,6.731 ; -14.732,-2.921 -14.732,1.397 ; -14.097,-5.461 -14.097,-1.143 ; -13.589,23.241 -5.969,23.241 ; -9.144,23.241 -7.366,20.701 -7.366,7.931 -8.382,6.731 ; -8.382,-7.62 -8.382,-16.383 -6.985,-16.383 -6.731,-16.383 -6.731,-14.351 ; -7.531,-15.151 -6.731,-14.351 ; -5.931,-15.151 -6.731,-14.351
  text "ADC6" at 6.477,36.449 h1.5 r90
  text "ADC4" at 9.017,36.449 h1.5 r90
  text "ADC2" at 11.557,36.449 h1.5 r90
  text "ADC0" at 14.097,36.449 h1.5 r90
  text "TOS1" at 39.497,36.449 h1.5 r90
  text "TDO" at 42.037,36.449 h1.5 r90
  text "TCK" at 44.577,36.449 h1.5 r90
  text "SCL" at 47.117,36.449 h1.5 r90
  text "VCC" at 3.81,34.163 h2.4 r90
  text "6:" at 6.477,34.163 h2.4 r90
  text "4:" at 9.017,34.163 h2.4 r90
  text "2:" at 11.557,34.163 h2.4 r90
  text "0:" at 14.097,34.163 h2.4 r90
  text "VCC" at 36.83,34.163 h2.4 r90
  text "6:" at 39.497,34.163 h2.4 r90
  text "4:" at 42.037,34.163 h2.4 r90
  text "2:" at 44.577,34.163 h2.4 r90
  text "0:" at 47.117,34.163 h2.4 r90
  text "POWER" at -13.462,27.559 h2
  text "O" at -13.462,23.654 h3.5
  text "USB-UART" at -27.7,21.463 h2.4
  text "ADC7" at 6.477,19.685 h1.5 r90
  text "ADC5" at 9.017,19.685 h1.5 r90
  text "ADC3" at 11.557,19.685 h1.5 r90
  text "ADC1" at 14.097,19.685 h1.5 r90
  text "TOS2" at 39.497,19.685 h1.5 r90
  text "TDI" at 42.037,19.685 h1.5 r90
  text "TMS" at 44.577,19.685 h1.5 r90
  text "SDA" at 47.117,19.685 h1.5 r90
  text "CONVERTER" at -22.479,19.558 h2.4
  text "JTAG" at 66.675,17.653 h2.4 r90
  text "P  O  R  T  A" at -2.921,17.399 h2.4 r90
  text "GND" at 3.937,17.399 h2.4 r90
  text "7:" at 6.477,17.399 h2.4 r90
  text "5:" at 9.017,17.399 h2.4 r90
  text "3:" at 11.557,17.399 h2.4 r90
  text "1:" at 14.097,17.399 h2.4 r90
  text "P  O  R  T  A" at 20.256,17.399 h2.4 r90
  text "P  O  R  T  C" at 30.099,17.399 h2.4 r90
  text "GND" at 36.957,17.399 h2.4 r90
  text "7:" at 39.497,17.399 h2.4 r90
  text "5:" at 42.037,17.399 h2.4 r90
  text "3:" at 44.577,17.399 h2.4 r90
  text "1:" at 47.117,17.399 h2.4 r90
  text "P  O  R  T  C" at 53.276,17.399 h2.4 r90
  text "TxD" at -26.943,15.991 h2.4
  text "RxD0" at -14.478,16.002 h2.4
  text "RxD" at -26.943,13.451 h2.4
  text "TxD0" at -14.478,13.451 h2.4
  text "nDTR" at -26.943,10.911 h2.4
  text "nRST" at -14.478,10.911 h2.4
  text "Rx" at -26.689,7.62 h2
  text "Tx" at -17.526,7.62 h2
  text "ATmega164PA / 324PA / 644PA" at 0.762,6.604 h3
  text "TARGET" at -27.686,4.572 h2.4
  text "KANDA" at 66.675,3.048 h2.4 r90
  text "VOLTAGE" at -20.447,2.54 h2.4
  text "3V3" at -14.732,-0.254 h2.4
  text "5V0" at -14.097,-5.461 h2.4
  text "CLKO / T1" at 3.937,-6.477 h1.5 r90
  text "AIN1 / OC0A" at 6.477,-6.477 h1.5 r90
  text "MOSI" at 9.017,-6.477 h1.5 r90
  text "SCK" at 11.557,-6.477 h1.5 r90
  text "TXD0" at 36.957,-6.477 h1.5 r90
  text "TXD1 / INT1" at 39.497,-6.477 h1.5 r90
  text "OC1A" at 42.037,-6.477 h1.5 r90
  text "OC2A" at 44.577,-6.477 h1.5 r90
  text "1:" at 3.937,-8.763 h2.4 r90
  text "3:" at 6.477,-8.763 h2.4 r90
  text "5:" at 9.017,-8.763 h2.4 r90
  text "7:" at 11.557,-8.763 h2.4 r90
  text "GND" at 13.97,-8.763 h2.4 r90
  text "1:" at 36.957,-8.763 h2.4 r90
  text "3:" at 39.497,-8.763 h2.4 r90
  text "5:" at 42.037,-8.763 h2.4 r90
  text "7:" at 44.577,-8.763 h2.4 r90
  text "GND" at 46.99,-8.763 h2.4 r90
  text "http://bit.ly/2wq4n0I" at -5.842,-13.716 h2 r90
  text "D" at -17.653,-16.383 h10
  text "w" at -27.305,-16.764 h17
  text "ATMEL" at 66.675,-17.145 h2.4 r90
  text "h t t p : / / e l e k t r o n i c y . p . l o d z . p l" at 70.993,-18.288 h2.3 r90
  text "RESET" at -27.178,-18.796 h2
  text "T0" at 3.937,-23.241 h1.5 r90
  text "AIN0 / INT2" at 6.477,-23.241 h1.5 r90
  text "nSS / OC0B" at 9.017,-23.241 h1.5 r90
  text "MISO" at 11.557,-23.241 h1.5 r90
  text "RXD0" at 36.957,-23.241 h1.5 r90
  text "RXD1 / INT0" at 39.497,-23.241 h1.5 r90
  text "OC1B" at 42.037,-23.241 h1.5 r90
  text "OC2B / ICP1" at 44.577,-23.241 h1.5 r90
  text "8" at -18.415,-25.4 h7.5
  text "P   O   R   T   B" at -2.921,-25.4 h2.4 r90
  text "0:" at 3.937,-25.4 h2.4 r90
  text "2:" at 6.477,-25.4 h2.4 r90
  text "4:" at 9.017,-25.4 h2.4 r90
  text "6:" at 11.557,-25.4 h2.4 r90
  text "VCC" at 14.097,-25.4 h2.4 r90
  text "P  O  R  T  B" at 20.256,-25.4 h2.4 r90
  text "P  O  R  T  D" at 30.099,-25.4 h2.4 r90
  text "0:" at 36.957,-25.4 h2.4 r90
  text "2:" at 39.497,-25.4 h2.4 r90
  text "4:" at 42.037,-25.4 h2.4 r90
  text "6:" at 44.577,-25.4 h2.4 r90
  text "VCC" at 47.117,-25.4 h2.4 r90
  text "P  O  R  T  D" at 53.276,-25.4 h2.4 r90
Bottom Overlay:
  lines w0.15: 56.134,-19.05 59.055,-19.05 59.309,-19.05 59.69,-18.669 ; 56.134,-17.78 56.769,-17.78 ; 56.134,-16.51 59.055,-16.51 59.309,-16.51 59.69,-16.129 ; 56.134,-15.24 56.769,-15.24 ; 56.134,-13.97 59.055,-13.97 59.309,-13.97 59.69,-13.589 ; 56.134,-12.7 56.769,-12.7 ; 56.134,-2.54 59.055,-2.54 59.309,-2.54 59.69,-2.159 ; 56.134,-1.27 56.769,-1.27 ; 56.134,0 59.055,0 59.309,0 59.69,0.381 ; 56.134,1.27 56.769,1.27 ; 56.134,2.54 59.055,2.54 59.309,2.54 59.69,2.921 ; 56.134,3.81 56.769,3.81 ; 56.134,5.08 59.055,5.08 59.309,5.08 59.69,5.461 ; 56.134,6.35 56.769,6.35 ; 56.134,7.62 59.055,7.62 59.309,7.62 59.69,8.001 ; 56.134,8.89 56.769,8.89 ; 56.134,21.59 59.055,21.59 59.309,21.59 59.69,21.971 ; 56.134,22.86 56.769,22.86 ; 56.134,24.13 59.055,24.13 59.309,24.13 59.69,24.511 ; 56.134,25.4 56.769,25.4 ; 56.134,26.67 59.055,26.67 59.309,26.67 59.69,27.051 ; 56.134,27.94 56.769,27.94 ; 56.134,29.21 59.055,29.21 59.309,29.21 59.69,29.591 ; 56.134,30.48 56.769,30.48 ; 56.134,31.75 59.055,31.75 59.309,31.75 59.69,32.131 ; 56.134,33.02 56.769,33.02 ; 56.515,-18.034 56.769,-17.78 ; 56.515,-17.526 56.769,-17.78 ; 56.515,-15.494 56.769,-15.24 ; 56.515,-14.986 56.769,-15.24 ; 56.515,-12.954 56.769,-12.7 ; 56.515,-12.446 56.769,-12.7 ; 56.515,-1.524 56.769,-1.27 ; 56.515,-1.016 56.769,-1.27 ; 56.515,1.016 56.769,1.27 ; 56.515,1.524 56.769,1.27 ; 56.515,3.556 56.769,3.81 ; 56.515,4.064 56.769,3.81 ; 56.515,6.096 56.769,6.35 ; 56.515,6.604 56.769,6.35 ; 56.515,8.636 56.769,8.89 ; 56.515,9.144 56.769,8.89 ; 56.515,22.606 56.769,22.86 ; 56.515,23.114 56.769,22.86 ; 56.515,25.146 56.769,25.4 ; 56.515,25.654 56.769,25.4 ; 56.515,27.686 56.769,27.94 ; 56.515,28.194 56.769,27.94 ; 56.515,30.226 56.769,30.48 ; 56.515,30.734 56.769,30.48 ; 56.515,32.766 56.769,33.02 ; 56.515,33.274 56.769,33.02 ; 59.309,-18.669 59.69,-18.669 ; 59.309,-16.129 59.69,-16.129 ; 59.309,-13.589 59.69,-13.589 ; 59.309,-2.159 59.69,-2.159 ; 59.309,0.381 59.69,0.381 ; 59.309,2.921 59.69,2.921 ; 59.309,5.461 59.69,5.461 ; 59.309,8.001 59.69,8.001 ; 59.309,21.971 59.69,21.971 ; 59.309,24.511 59.69,24.511 ; 59.309,27.051 59.69,27.051 ; 59.309,29.591 59.69,29.591 ; 59.309,32.131 59.69,32.131 ; 59.69,-19.05 59.69,-18.669 ; 59.69,-16.51 59.69,-16.129 ; 59.69,-13.97 59.69,-13.589 ; 59.69,-2.54 59.69,-2.159 ; 59.69,0 59.69,0.381 ; 59.69,2.54 59.69,2.921 ; 59.69,5.08 59.69,5.461 ; 59.69,7.62 59.69,8.001 ; 59.69,21.59 59.69,21.971 ; 59.69,24.13 59.69,24.511 ; 59.69,26.67 59.69,27.051 ; 59.69,29.21 59.69,29.591 ; 59.69,31.75 59.69,32.131
  text "POLITECHNIKA ŁÓDZKA" at 54.102,36.703 h4.5
  text "JTAG:" at 61.468,33.147 h1.7
  text "TCK" at 55.753,32.385 h1.7
  text "GND" at 55.753,31.115 h1.7
  text "TDO" at 55.753,29.845 h1.7
  text "VCC" at 55.753,28.575 h1.7
  text "TMS" at 55.753,27.305 h1.7
  text "nRESET" at 55.753,26.035 h1.7
  text "VCC" at 55.753,24.765 h1.7
  text "N.C." at 55.753,23.495 h1.7
  text "TDI" at 55.753,22.225 h1.7
  text "AVCC" at 26.035,21.133 h1.7 r90
  text "GND" at 55.753,20.955 h1.7
  text "AREF" at 20.955,20.879 h1.7 r90
  text "GND" at 23.495,20.244 h1.7 r90
  text "PA0" at 0.635,19.863 h1.7 r90
  text "PA1" at 3.175,19.863 h1.7 r90
  text "PA2" at 5.715,19.863 h1.7 r90
  text "PA3" at 8.255,19.863 h1.7 r90
  text "PA4" at 10.795,19.863 h1.7 r90
  text "PA5" at 13.335,19.863 h1.7 r90
  text "PA6" at 15.875,19.863 h1.7 r90
  text "PA7" at 18.415,19.863 h1.7 r90
  text "PC7" at 28.575,19.863 h1.7 r90
  text "PC6" at 31.115,19.863 h1.7 r90
  text "PC5" at 33.655,19.863 h1.7 r90
  text "PC4" at 36.195,19.863 h1.7 r90
  text "PC3" at 38.735,19.863 h1.7 r90
  text "PC2" at 41.275,19.863 h1.7 r90
  text "PC1" at 43.815,19.863 h1.7 r90
  text "PC0" at 46.355,19.863 h1.7 r90
  text "PD7" at 48.895,19.863 h1.7 r90
  text "KANDA ISP:" at 61.468,9.017 h1.7
  text "MOSI" at 55.753,8.255 h1.7
  text "VCC" at 55.753,6.985 h1.7
  text "LED" at 55.753,5.715 h1.7
  text "GND" at 55.753,4.445 h1.7
  text "[" at 15.113,3.937 h14.7
  text "e" at 39.497,3.937 h14.7
  text "Y" at 49.149,3.937 h14.7
  text "nRESET" at 55.753,3.175 h1.7
  text "GND" at 55.753,1.905 h1.7
  text "SCK" at 55.753,0.635 h1.7
  text "GND" at 55.753,-0.635 h1.7
  text "PB0" at 0.635,-1.651 h1.7 r90
  text "PB1" at 3.175,-1.651 h1.7 r90
  text "PB2" at 5.715,-1.651 h1.7 r90
  text "PB3" at 8.255,-1.651 h1.7 r90
  text "PB4" at 10.795,-1.651 h1.7 r90
  text "PB5" at 13.335,-1.651 h1.7 r90
  text "PB6" at 15.875,-1.651 h1.7 r90
  text "PB7" at 18.415,-1.651 h1.7 r90
  text "nRESET" at 20.955,-1.651 h1.7 r90
  text "VCC" at 23.495,-1.651 h1.7 r90
  text "GND" at 26.035,-1.651 h1.7 r90
  text "XTAL2" at 28.575,-1.651 h1.7 r90
  text "XTAL1" at 31.115,-1.651 h1.7 r90
  text "PD0" at 33.655,-1.651 h1.7 r90
  text "PD1" at 36.195,-1.651 h1.7 r90
  text "PD2" at 38.735,-1.651 h1.7 r90
  text "PD3" at 41.275,-1.651 h1.7 r90
  text "PD4" at 43.815,-1.651 h1.7 r90
  text "PD5" at 46.355,-1.651 h1.7 r90
  text "PD6" at 48.895,-1.651 h1.7 r90
  text "MISO" at 55.753,-1.905 h1.7
  text "GND" at 55.753,-3.175 h1.7
  text "ATMEL ISP:" at 61.468,-12.573 h1.7
  text "MISO" at 55.753,-13.335 h1.7
  text "VCC" at 55.753,-14.605 h1.7
  text "SCK" at 55.753,-15.875 h1.7
  text "MOSI" at 55.753,-17.145 h1.7
  text "Katedra Mikroelektroniki i Technik Informatycznych" at 39.37,-17.907 h1.9
  text "nRESET" at 55.753,-18.415 h1.7
  text "Instytut Elektroniki" at 39.37,-19.431 h1.9
  text "GND" at 55.753,-19.685 h1.7
  text "Katedra Przyrządów Półprzewodnikowych" at 39.37,-20.955 h1.9
  text "i Optoelektronicznych" at 39.37,-22.479 h1.9
  text "http://elektronicy.p.lodz.pl" at 39.37,-24.765 h1.9
  text "D" at 49.276,-25.4 h9.5

## Dimensions
68.04,37.12 to 68.04,-21.88 on Mechanical 1
68.04,37.12 to -9.96,37.12 on Mechanical 1
72.3,41.12 to 72.3,-25.88 on Mechanical 1
-27.7,41.12 to 72.3,41.12 on Mechanical 1